# EAGLE board microsd-switch-till-handrouted (EAGLE 6.5.0)
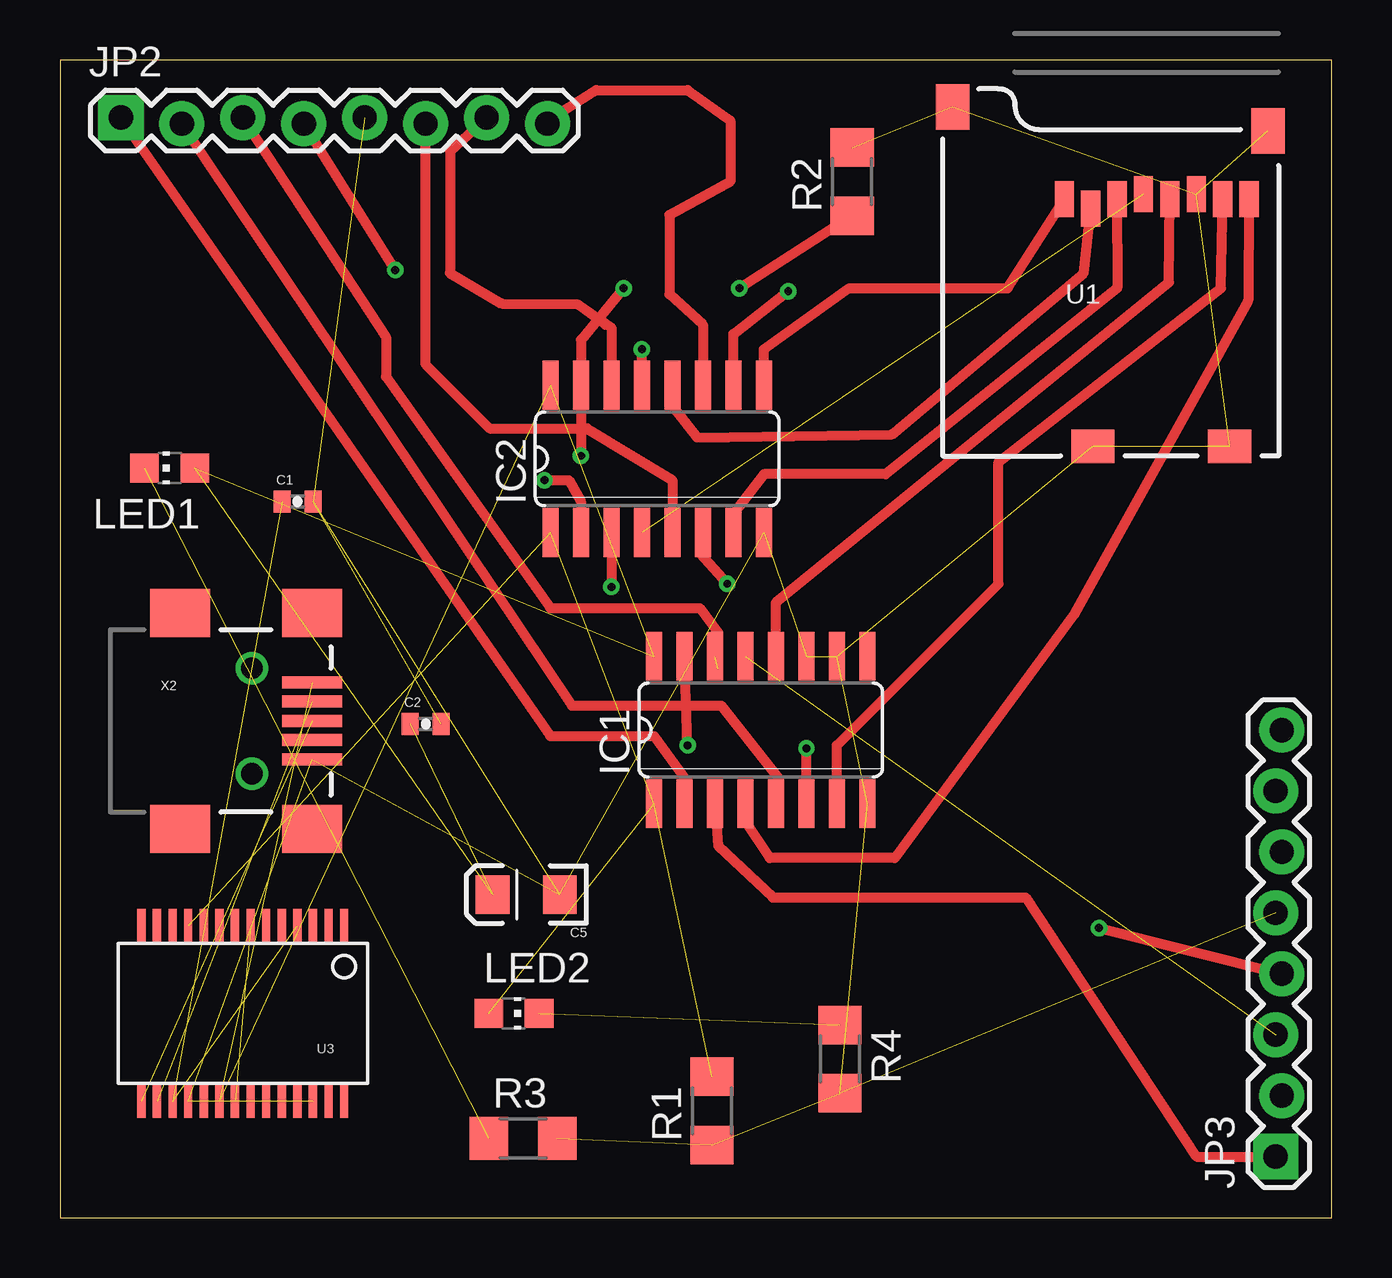
[diagram p0: board, top side]
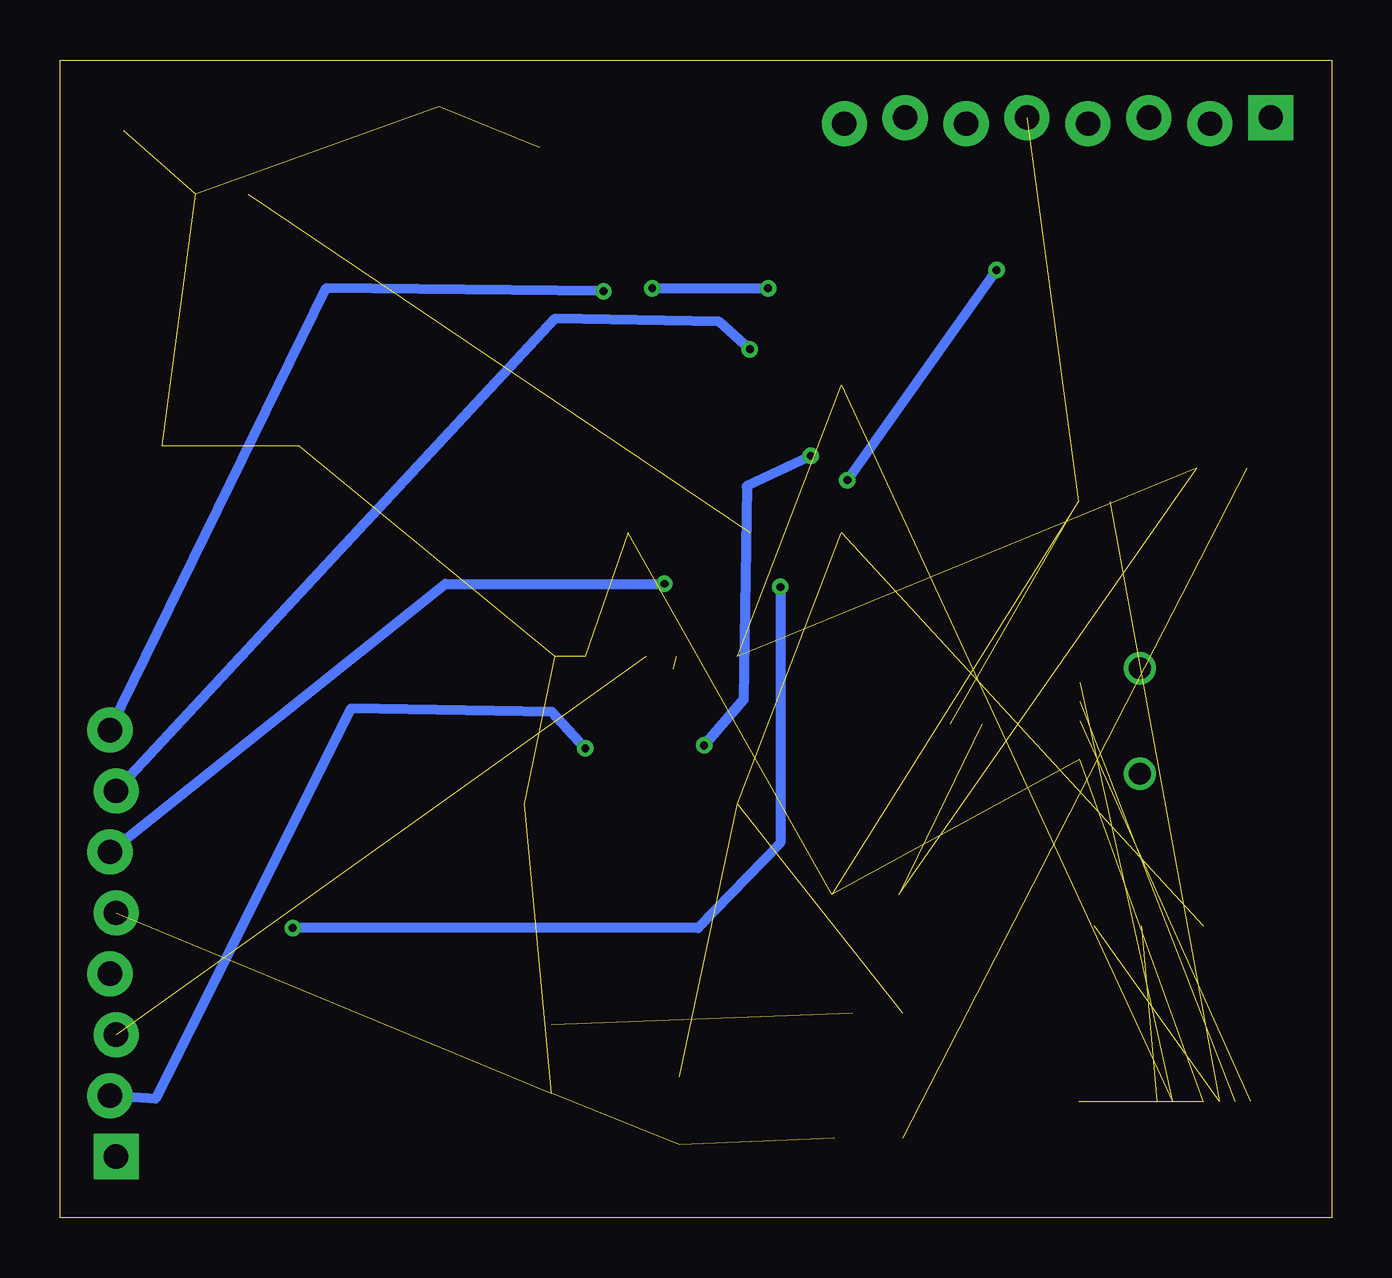
[diagram p1: board, bottom side, seen from below]

Size 53.01 x 48.25 mm. Coordinates in mm from the lower left corner, seen from the top.
Outline: 0,0 53.01,0 53.01,48.25 0,48.25 0,0
Copper layers (1*16): Top 0.0356mm / dielectric 1.5011mm / Bottom 0.0356mm
Design rules "LaenPCBOrder": minimum track width 6mil, minimum drill 13mil, track to track 6mil, track to pad 6mil, pad to pad 6mil, via to via 6mil, smd to smd 6mil, copper to edge 15mil, drill to drill 6mil, minimum pad ring 7mil, minimum via ring 7mil, stop-mask expansion 3mil, vias tented up to drill 0mil, thermal gap 10mil
Net classes: 0 default: width 0.406 mm, drill 0.254 mm, clearance 0.205 mm; 1 power: width 0.406 mm, drill 0.254 mm, clearance 0.205 mm to class 0, clearance 0.205 mm

## Footprints (pad centres in the part's own frame; a part is rotated, then mirrored left to right if it is on the bottom)
0402-CAP = smd 0.7 x 0.9: 1 -0.65,0; 2 0.65,0
EIA3216 = smd 1.4 x 1.6: A 1.4,0; C -1.4,0
SO16 = smd 0.66 x 2.032: 1 -4.445,-3.073; 2 -3.175,-3.073; 3 -1.905,-3.073; 4 -0.635,-3.073; 5 0.635,-3.073; 6 1.905,-3.073; 7 3.175,-3.073; 8 4.445,-3.073; 9 4.445,3.073; 10 3.175,3.073; 11 1.905,3.073; 12 0.635,3.073; 13 -0.635,3.073; 14 -1.905,3.073; 15 -3.175,3.073; 16 -4.445,3.073
1X08_LOCK = drill 1.016 pad 1.88 square: 1 0,0.127 | drill 1.016 pad 1.88: 2 2.54,-0.127; 3 5.08,0.127; 4 7.62,-0.127; 5 10.16,0.127; 6 12.7,-0.127; 7 15.24,0.127; 8 17.78,-0.127
CHIP-LED0805 = smd 1.2 x 1.2: A 0,-1.05; C 0,1.05
R1206 = smd 1.6 x 1.803: 1 -1.422,0; 2 1.422,0
MICRO-SD-SOCKET-PP = smd 0.8 x 1.5: 1 -8.94,10.7; 2 -7.84,10.3; 3 -6.74,10.7; 4 -5.64,10.9; 5 -4.54,10.7; 6 -3.44,10.9; 7 -2.34,10.7; 8 -1.24,10.7 | smd 1.8 x 1.4: CD1 -2.05,0.4; CD2 -7.75,0.4 | smd 1.4 x 1.9: GND1 -13.6,14.55; GND3 -0.45,13.55
SSOP28DB = smd 0.348 x 1.397: 1 -4.225,-3.656; 2 -3.575,-3.656; 3 -2.925,-3.656; 4 -2.275,-3.656; 5 -1.625,-3.656; 6 -0.975,-3.656; 7 -0.325,-3.656; 8 0.325,-3.656; 9 0.975,-3.656; 10 1.625,-3.656; 11 2.275,-3.656; 12 2.925,-3.656; 13 3.575,-3.656; 14 4.225,-3.656; 15 4.225,3.656; 16 3.575,3.656; 17 2.925,3.656; 18 2.275,3.656; 19 1.625,3.656; 20 0.975,3.656; 21 0.325,3.656; 22 -0.325,3.656; 23 -0.975,3.656; 24 -1.625,3.656; 25 -2.275,3.656; 26 -2.925,3.656; 27 -3.575,3.656; 28 -4.225,3.656
USB-MINIB-NOSTOP = smd 2.5 x 0.5: D+ 2.5,0; D- 2.5,0.8; GND 2.5,-1.6; ID 2.5,-0.8; VBUS 2.5,1.6 | smd 2.5 x 2: G1 -3,-4.5; G2 -3,4.5; G3 2.5,4.5; G4 2.5,-4.5 | drill 0.9 pad 0.8: H1 0,2.2 | drill 0.9 pad 0.787: H2 0,-2.2

## Placement (x,y rotation side)
C1  0.1uF  [0402-CAP]  9.91,29.84 0 top
C2  0.1uF  [0402-CAP]  15.24,20.57 0 top
C5  10uF  [EIA3216]  19.43,13.46 180 top
IC1  SN74CBT3257D  [SO16]  29.21,20.32 0 top
IC2  SN74CBT3257D  [SO16]  24.89,31.62 0 top
JP2  USD-HEADER-TARGET  [1X08_LOCK]  2.54,45.72 0 top
JP3  USD-HEADER-HOST  [1X08_LOCK]  50.8,2.54 90 top
LED1  POWER  [CHIP-LED0805]  4.57,31.24 90 top
LED2  SWITCH  [CHIP-LED0805]  18.92,8.51 270 top
R1  10k  [R1206]  27.18,4.45 90 top
R2  10k  [R1206]  33.02,43.18 90 top
R3  1k  [R1206]  19.3,3.3 0 top
R4  1k  [R1206]  32.51,6.6 270 top
U1  USD-SOCKETNEW  [MICRO-SD-SOCKET-PP]  50.8,31.75 0 top
U3  FT232RLSSOP  [SSOP28DB]  7.62,8.51 180 top
X2  USB-SMD-NS  [USB-MINIB-NOSTOP]  8,20.7 0 top

## Library data of the parts
C1 C2 C5 JP2 JP3 U1 U3 X2 = SparkFun
IC1 IC2 = joels-parts
LED1 LED2 = led
R1-R4 = rcl

## Nets
3.3V [power]: C1.1 U3.4 U3.17
CLK-A: IC1.14 JP2.3
CLK-B: IC1.13 JP3.3
CLK-Y: IC1.12 U1.5
CMD-A: IC2.5 JP2.6
CMD-B: IC2.6 JP3.6
CMD-Y: IC2.7 U1.3
DAT0-A: IC1.5 JP2.2
DAT0-B: IC1.6 JP3.2
DAT0-Y: IC1.7 U1.7
DAT1-A: IC1.2 JP2.1
DAT1-B: IC1.3 JP3.1
DAT1-Y: IC1.4 U1.8
DAT2-A: IC2.11 JP2.8
DAT2-B: IC2.10 JP3.8
DAT2-Y: IC2.9 U1.1
DAT3-A: IC2.14 JP2.7
DAT3-B: IC2.13 JP3.7
DAT3-Y: IC2.12 U1.2
GND: C1.2 C2.2 C5.C IC1.8 IC1.10 IC1.11 IC2.8 JP2.5 JP3.5 R1.1 R2.2 R3.2 R4.2 U1.6 U1.CD1 U1.CD2 U1.GND1 U1.GND3 U3.7 U3.18 U3.21 U3.25 U3.26 X2.GND
HOSTSELECT: IC1.1 IC2.1 LED2.A R1.2 U3.11
N$2: IC2.4 U1.4
N$3: LED1.C R3.1
N$4: LED2.C R4.1
OE: IC1.15 IC2.15 R2.1
USB_D+: U3.15 X2.D+
USB_D-: U3.16 X2.D-
VCC: C2.1 C5.A IC1.16 IC2.16 LED1.A U3.20 X2.VBUS
VDD-A: IC2.2 JP2.4
VDD-B: IC2.3 JP3.4

## Tracks (layer width: path | path; a pad name or v marks a point on that pad's centre or on a via)
3.3V  (2 unrouted)
CLK-A  (1 unrouted)
  Top 0.406: JP2.3 13.59,36.7 13.59,35.05 20.45,25.4 26.67,25.4 27.43,24.38 27.43,22.86
CLK-B  (1 unrouted)
CLK-Y
  Top 0.406: IC1.12 29.84,25.65 46.23,38.99 U1.5
CMD-A
  Top 0.406: JP2.6 15.24,35.56 17.91,32.89 21.97,32.89 25.53,30.73 IC2.5
CMD-B  (via drill 0.33)
  Top 0.406: v27.81,26.42 26.67,27.69 IC2.6
  Bottom 0.406: JP3.6 36.96,26.42 v27.81,26.42
CMD-Y
  Top 0.406: U1.3 44.07,38.73 34.42,30.99 29.34,30.99 28.07,29.34 IC2.7
DAT0-A
  Top 0.406: JP2.2 21.34,21.34 27.56,21.34 29.97,18.29 IC1.5
DAT0-B  (via drill 0.33)
  Top 0.406: IC1.6 v31.11,19.56
  Bottom 0.406: v31.11,19.56 32.51,21.08 40.89,21.21 49.02,4.95 JP3.2
DAT0-Y
  Top 0.406: IC1.7 32.38,19.68 39.12,26.42 39.12,31.5 48.39,38.73 U1.7
DAT1-A
  Top 0.406: JP2.1 20.45,20.07 24.77,20.07 26.16,18.16 IC1.2
DAT1-B
  Top 0.406: IC1.3 27.43,15.49 29.72,13.34 40.26,13.34 47.37,2.54 JP3.1
DAT1-Y
  Top 0.406: U1.8 49.53,38.23 42.29,25.15 34.8,14.99 29.59,14.99 28.57,16.51 IC1.4
DAT2-A
  Top 0.406: JP2.8 20.32,45.72 22.35,46.99 26.16,46.99 27.94,45.72 27.94,43.18 25.4,41.78 25.4,38.48 26.8,37.21 IC2.11
DAT2-B  (via drill 0.33)
  Top 0.406: IC2.10 28.07,36.83 v30.35,38.61
  Bottom 0.406: v30.35,38.61 41.91,38.73 JP3.8
DAT2-Y
  Top 0.406: IC2.9 29.34,36.2 32.89,38.73 39.5,38.73 U1.1
DAT3-A
  Top 0.406: 22.73,37.21 21.57,38.07 | 21.57,38.07 22.99,37.08 IC2.14 | JP2.7 16.26,44.45 16.26,39.37 18.41,38.1 21.57,38.07
DAT3-B  (via drill 0.33)
  Top 0.406: IC2.13 v24.26,36.2
  Bottom 0.406: v24.26,36.2 25.53,37.34 32.38,37.47 JP3.7
DAT3-Y
  Top 0.406: IC2.12 25.65,33.66 26.54,32.51 34.67,32.64 42.67,39.37 U1.2
GND  (23 unrouted)
HOSTSELECT  (4 unrouted)
N$2  (1 unrouted)
N$3  (1 unrouted)
N$4  (1 unrouted)
OE  (via drill 0.33)
  Top 0.406: R2.1 v28.32,38.73 | v23.5,38.73 21.72,36.58 IC2.15 v21.72,31.75 | v26.16,19.68 IC1.15
  Bottom 0.406: v28.32,38.73 v23.5,38.73 | v21.72,31.75 24.38,30.48 24.51,21.59 v26.16,19.68
USB_D+  (1 unrouted)
USB_D-  (1 unrouted)
VCC  (6 unrouted)
VDD-A  (via drill 0.33)
  Top 0.406: JP2.4 v13.97,39.5 | v20.19,30.73 21.21,30.73 21.72,29.84 IC2.2
  Bottom 0.406: v13.97,39.5 v20.19,30.73
VDD-B  (via drill 0.33)
  Top 0.406: IC2.3 v22.99,26.29 | v43.31,12.06 JP3.4
  Bottom 0.406: v22.99,26.29 22.99,15.62 26.42,12.06 v43.31,12.06